# Altium PCB 十六继电器.PcbDoc (part 1 of 2)
Units mm, origin at the board's own origin, x right, y up, seen from the top; angles counter-clockwise.
Board outline 122.4 x 87.4 mm, 2 copper layers (Top Layer, Bottom Layer); 47 components, 80 nets, 279 pads, 15 vias.
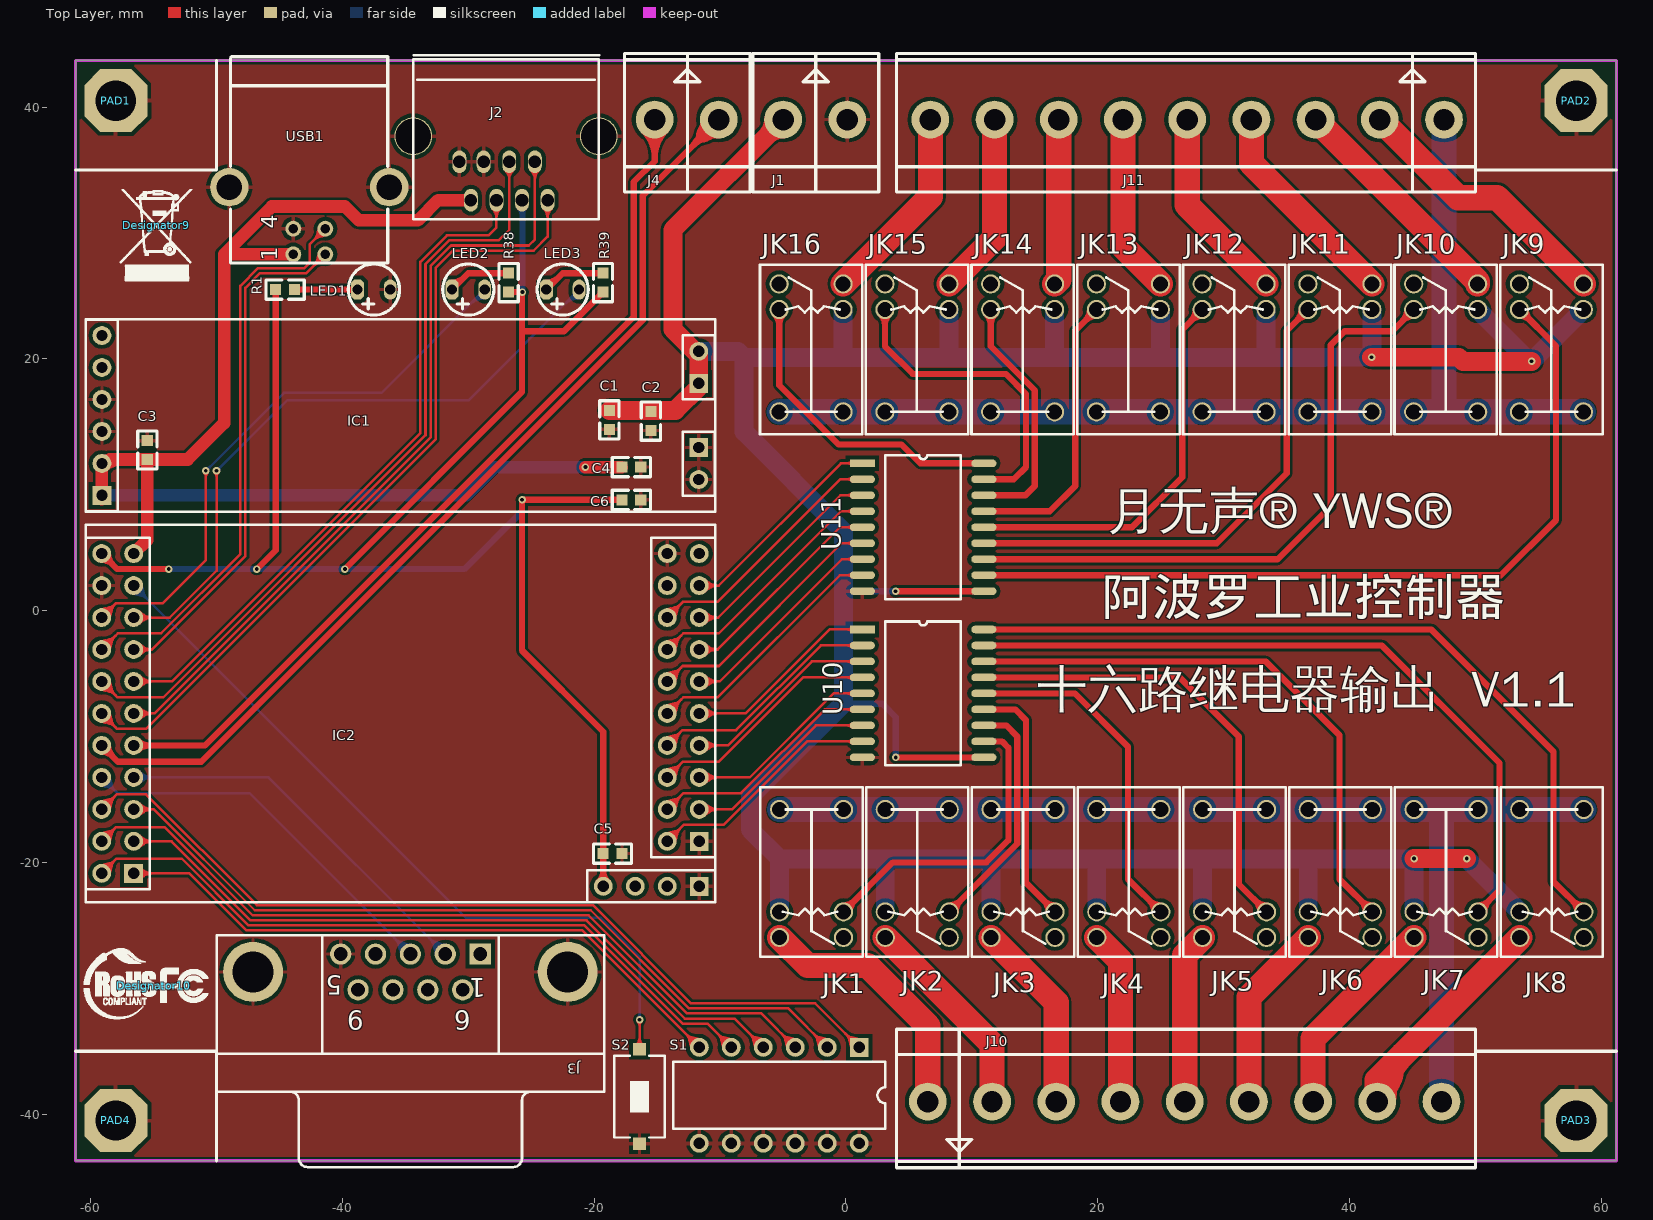
[diagram p0: Top Layer view]
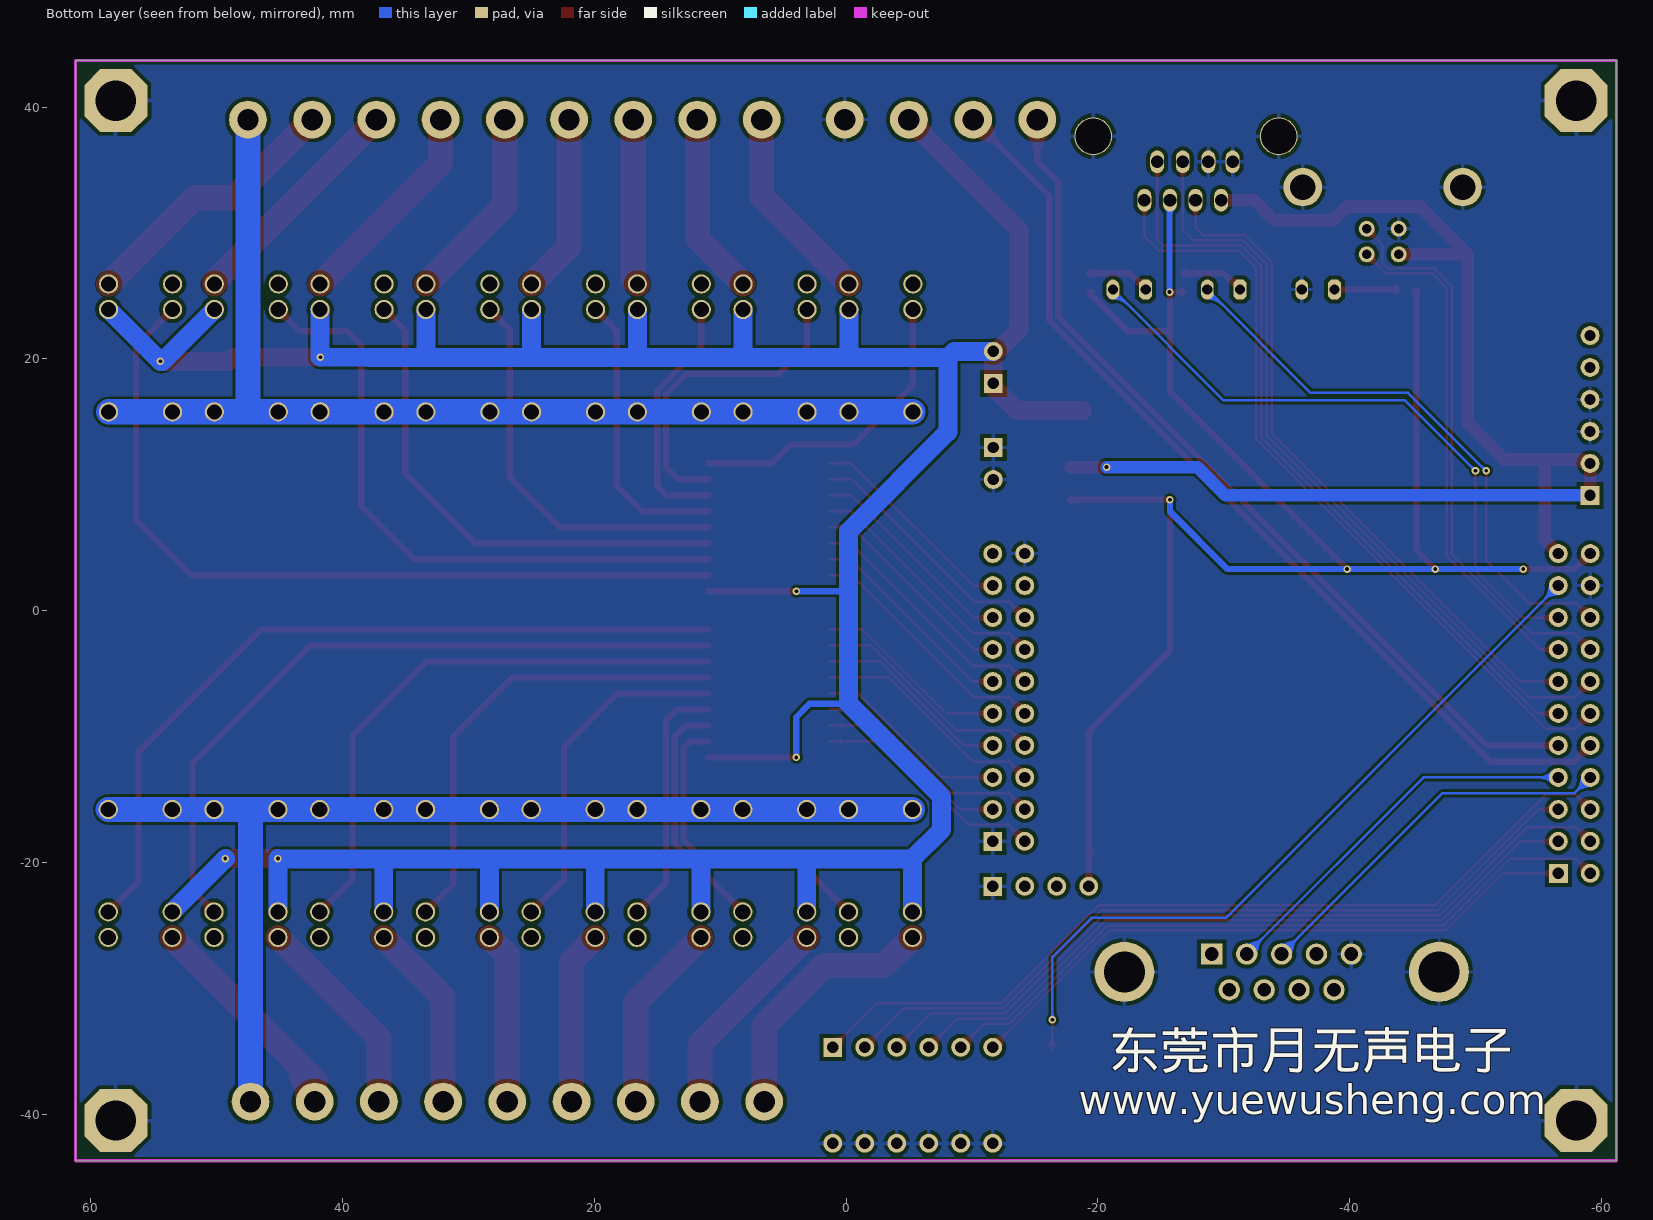
[diagram p1: Bottom Layer view, seen from below]

## Layer stack, top to bottom
Top Layer: signal copper 0.0356
Dielectric: dielectric 0.32, FR-4, Dk 4.8
Bottom Layer: signal copper 0.0356

## Board outline
-61.2,-43.7 61.2,-43.7 61.2,43.7 -61.2,43.7

## Design rules (kind name [scope] priority, off if disabled: settings)
Clearance [(InPadClass('All Pads')) vs InPolygon] p1: gap=0.3
Clearance Clearance_1 [All] p2: gap=0.2
ComponentClearance [All] p1 off: gap=0.254 collisioncheckmode=3 verticalgap=0.254 showdistances=FALSE
PlaneConnect [All] p1: planeconnectstyle=Relief reliefexpansion=0 reliefentries=4 reliefconductorwidth=0.3 reliefairgap=0.508
PolygonConnect PolygonConnect_1 [All vs IsComponentPad] p1: connectstyle=Relief reliefconductorwidth=0.3 reliefentries=4 polygonreliefangle="90 Angle" airgapwidth=0.3
PolygonConnect [All] p2: connectstyle=Direct reliefconductorwidth=0.3 reliefentries=4 polygonreliefangle="90 Angle" airgapwidth=0.3
RoomDefinition 6、十六继电器 [InComponentClass('6、十六继电器')] p1: confinementstyle=ConfineIn formatcopy=TRUE lockcomponents=FALSE outline -12,23.5 -12,28 3.5,28 3.5,46.6 62,46.6 62,-46.8 3.5,-46.8 3.5,-28 -12,-28 -12,-23.5 -9,-23.5 -9,23.5
RoomDefinition 公共电路 [InComponentClass('公共电路')] p2: confinementstyle=ConfineIn formatcopy=TRUE lockcomponents=FALSE outline -62,-44.5 3.5,-44.5 3.5,-43.7 61.2,-43.7 61.2,43.7 50,43.7 50,35 61.2,35 61.2,-35 50,-35 50,-43.7 3.5,-43.7 3.5,-28 -12,-28 -12,-23.5 -9.5,-23.5 -9.5,23.5 -12,23.5 -12,28 3.5,28 3.5,44.5 -62,44.5
RoutingVias [All] p1: holewidth=0.3 width=0.6 viastyle="Through Hole" minholewidth=0.3 minwidth=0.6 maxholewidth=0.3 maxwidth=0.6
SolderMaskExpansion [All] p1: expansion=0.102
Width [All] p1: maxlimit=2 minlimit=0.16 preferedwidth=0.2 minimp=50.000000 maximp=50.000000 favimp=50.000000
26 further rules are at their usual default settings.

## Classes and differential pairs
component class 公共电路: C1 C2 C3 C4 C5 C6 Designator9 Designator10 IC1 IC2 J1 J2 J3 J4 LED1 LED2 LED3 PAD1 PAD2 PAD3 PAD4 R1 R38 R39 S1 S2 usb1
component class 6、十六继电器: J10 J11 JK1 JK2 JK3 JK4 JK5 JK6 JK7 JK8 JK9 JK10 JK11 JK12 JK13 JK14 JK15 JK16 U10 U11

## Components (designator, comment, footprint, x,y, rotation, side; value= is the part's Value field where it differs from the comment)
C1 "104" 0603A -18.8,15.9 r270 top
C2 "104" 0603A -15.5,15.8 r270 top
C3 "104" 0603A -55.5,12 r90 top
C4 "104" 0603A -17.8,11.4 r0 top
C5 "104" 0603A -19.3,-19.3 r0 top
C6 "104" 0603A -17.8,8.8 r0 top
Designator9 "" HS -54.8,30.6 r0 top
Designator10 "" fc -55,-29.8 r0 top
IC1 "扩展模块电源板" 扩展模块电源板 -35.4,15.5 r180 top
IC2 "扩展模块核心板" 扩展模块核心板 -35.4,-8.2 r0 top
J1 "CON2" CON2*5.1 0.1,39 r0 top
J2 "CON8" "od-rj45 - duplicate" -23.7,32.6 r180 top
J3 "D Connector 9" DSUB1.385-2H9 -34.6,-38.2 r180 top
J4 "CON2" CON2*5.1 -10.1,39 r0 top
J10 "CON9" CON9*5.1 6.5,-39 r180 top
J11 "CON9" CON9*5.1 47.5,39 r0 top
JK1 "继电器6脚" RL -0.207,-15.811 r180 top
JK2 "继电器6脚" RL 8.193,-15.811 r180 top
JK3 "继电器6脚" RL 16.593,-15.811 r180 top
JK4 "继电器6脚" RL 24.993,-15.811 r180 top
JK5 "继电器6脚" RL 33.393,-15.811 r180 top
JK6 "继电器6脚" RL 41.793,-15.811 r180 top
JK7 "继电器6脚" RL 50.193,-15.811 r180 top
JK8 "继电器6脚" RL 58.593,-15.811 r180 top
JK9 "继电器6脚" RL 53.5,15.8 r0 top
JK10 "继电器6脚" RL 45.1,15.8 r0 top
JK11 "继电器6脚" RL 36.7,15.8 r0 top
JK12 "继电器6脚" RL 28.3,15.8 r0 top
JK13 "继电器6脚" RL 19.9,15.8 r0 top
JK14 "继电器6脚" RL 11.5,15.8 r0 top
JK15 "继电器6脚" RL 3.1,15.8 r0 top
JK16 "继电器6脚" RL -5.3,15.8 r0 top
LED1 "LED" LED2.5 -37.5,25.5 r180 top
LED2 "LED" LED2.5 -30,25.5 r180 top
LED3 "LED" LED2.5 -22.5,25.5 r180 top
PAD1 "PAD" PAD -58,40.5 r0 top
PAD2 "PAD" PAD 58,40.5 r0 top
PAD3 "PAD" PAD 58,-40.5 r0 top
PAD4 "PAD" PAD -58,-40.5 r0 top
R1 "160" 0603A -45.3,25.5 r0 top
R38 "160" 0603A -26.8,25.3 r90 top
R39 "160" 0603A -19.3,25.3 r90 top
S1 "SW DIP-6" DIP-12/SW -5.3,-38.5 r180 top
S2 "RESRT" SW-PB2 -16.4,-38.6 r270 top
U10 "ULN2803" sol18 1.3,-1.5 r0 top
U11 "ULN2803" sol18 1.3,11.7 r0 top
USB1 "USB" USB-B3 -43.9,28.3 r90 top

## Footprints (in the part's own frame and the unit in brackets; to place one, negate y for a bottom-side part, rotate by r counter-clockwise, add the part's x,y. Pads: shape width x height; smd on the part's side, far side on the other; paste and mask are expansions set on the pad)
0603A [mm]
  rect 0.88x0.88 smd: 1(0,0) 2(1.5,0)
  silkscreen extent -0.76,-0.76 2.26,0.76
CON2*5.1 [mm]
  round 3 hole 1.7: 1(0,0) 2(-5.1,0)
  silkscreen extent -7.5,-5.75 2.5,5.25
CON9*5.1 [mm]
  round 3 hole 1.7: 1(0,0) 2(-5.1,0) 3(-10.2,0) 4(-15.3,0) 5(-20.4,0) 6(-25.5,0) 7(-30.6,0) 8(-35.7,0) 9(-40.8,0)
  silkscreen extent -43.5,-5.75 2.5,5.25
DIP-12/SW [mm] "DIP Switch; 12 Leads"
  rect 1.5x1.5 hole 0.9: 1(-6.35,-3.81)
  round 1.5 hole 0.9: 2(-3.81,-3.81) 3(-1.27,-3.81) 4(1.27,-3.81) 5(3.81,-3.81) 6(6.35,-3.81) 7(6.35,3.81) 8(3.81,3.81) 9(1.27,3.81) 10(-1.27,3.81) 11(-3.81,3.81) 12(-6.35,3.81)
  silkscreen extent -8.43,-2.65 8.41,2.65
DSUB1.385-2H9 [mm] "Connector; D Subminiature; 9 Position; Right Angle; Pitch 1.385 mm"
  rect 1.69x1.69 hole 1.09: 1(-5.54,-10.92)
  round 1.69 hole 1.09: 2(-2.77,-10.92) 3(0,-10.92) 4(2.77,-10.92) 5(5.54,-10.92) 6(-4.155,-8.08) 7(-1.385,-8.08) 8(1.385,-8.08) 9(4.155,-8.08)
  round 4.76 hole 3.26: 10(-12.495,-9.5) 11(12.495,-9.5)
  silkscreen extent -15.4,-12.4 15.4,6
fc [mm]
  silkscreen extent -5.53,-2.62 4.36,3
HS [mm]
  silkscreen extent -2.87,-4.39 2.87,2.87
LED2.5 [mil]
  oct 40x63 hole 32: A(51.18,0)
  oval 40x63 hole 32: K(-51.18,0)
  silkscreen extent -80,-80 80,80
"od-rj45 - duplicate" [mm]
  oval 1.1x1.8 hole 1: 1(0,0) 2(1.016,-3.048) 3(2.032,0) 4(3.048,-3.048) 5(4.064,0) 6(5.08,-3.048) 7(6.096,0) 8(7.012,-3.048)
  round 3 hole 2.8: 8(-4.064,-5.08) 8(10.668,-5.08)
  silkscreen extent -4.1,-11.53 10.67,1.52
PAD [mm]
  oct 5x5 hole 3.2: 1(0,0)
RL [mil]
  round 60 hole 47.24: 1(-0.29,399.55) 2(-0.29,319.55) 6(-0.29,-0.45) 7(199.71,-0.45) 11(199.71,319.55) 12(199.71,399.55)
  silkscreen extent -60,-70 260,460
sol18 [mm]
  rect 2x0.6 smd: 1(0,0)
  oval 2x0.6 smd: 2(0,-1.27) 3(0,-2.54) 4(0,-3.81) 5(0,-5.08) 6(0,-6.35) 7(0,-7.62) 8(0,-8.89) 9(0,-10.16) 10(9.65,-10.16) 11(9.65,-8.89) 12(9.65,-7.62) 13(9.65,-6.35) 14(9.65,-5.08) 15(9.65,-3.81) 16(9.65,-2.54) 17(9.65,-1.27) 18(9.65,0)
  silkscreen extent 1.84,-10.79 7.82,0.64
SW-PB2 [mm]
  rect 1x1 smd: 1(-3.75,0) 2(3.75,0)
  silkscreen extent -3.25,-2 3.25,2
USB-B3 [mil]
  round 50 hole 30: 1(0,0) 2(0,-100) 3(80,-100) 4(80,0)
  round 120 hole 80: 5(210,200) 6(210,-300)
  silkscreen extent -28,-295 618,197
扩展模块核心板 [mm]
  rect 1.5x1.5 hole 0.9: 1(-21.18,-12.67) 42(23.74,-10.13) 43(23.74,-13.7)
  round 1.5 hole 0.9: 2(-23.72,-12.67) 3(-21.18,-10.13) 4(-23.72,-10.13) 5(-21.18,-7.59) 6(-23.72,-7.59) 7(-21.18,-5.05) 8(-23.72,-5.05) 9(-21.18,-2.51) 10(-23.72,-2.51) 11(-21.18,0.03) 12(-23.72,0.03) 13(-21.18,2.57) 14(-23.72,2.57) 15(-21.18,5.11) 16(-23.72,5.11) 17(-21.18,7.65) 18(-23.72,7.65) 19(-21.18,10.19) 20(-23.72,10.19) 21(-21.18,12.73) 22(-23.72,12.73) 23(21.2,12.73) 24(23.74,12.73) 25(21.2,10.19) 26(23.74,10.19) 27(21.2,7.65) 28(23.74,7.65) 29(21.2,5.11) 30(23.74,5.11) 31(21.2,2.57) 32(23.74,2.57) 33(21.2,0.03) 34(23.74,0.03) 35(21.2,-2.51) 36(23.74,-2.51) 37(21.2,-5.05) 38(23.74,-5.05) 39(21.2,-7.59) 40(23.74,-7.59) 41(21.2,-10.13) 44(21.2,-13.7) 45(18.66,-13.7) 46(16.12,-13.7)
  silkscreen extent -24.99,-14.97 25.01,15.03
扩展模块电源板 [mm]
  round 1.5 hole 0.9: 1(-23.7,-5.09) 2(-23.7,5.09) 3(23.7,3.81) 4(23.7,-1.27) 4(23.7,1.27) 5(23.7,-6.35) 5(23.7,-3.81)
  rect 1.5x1.5 hole 0.9: 1(-23.7,-2.55) 2(-23.7,2.55) 3(23.7,6.35)
  silkscreen extent -25,-7.65 25,7.65

## Part data
C1 C2 C3 C4 C5 C6: library part CAP, "Capacitor"
Designator9 Designator10: library part PAD
J3: "Receptacle Assembly, 9 Position, Right Angle"
R1 R38 R39: library part RES2
S1: "DIP Switch, 6 Position, SPST"
S2: library part SW-PB
USB1: library part "HEADER 3X2"

## Via types
v1: diameter 0.6, hole 0.3, Top Layer to Bottom Layer, 15 vias

## Nets (pads, with @x,y where several pads share a name; then routed paths per layer and width w, separated by ;. In a path a pad name is that pad's centre, name@x,y a point inside that pad or via, vN(x,y) a via of type N, cw(c..) or ccw(c..) an arc to the next point about the centre after c; other vN are vias at no path point)
485A: IC2.10 J4.1 | length 102
  Top Layer w0.5: IC2.10@-59.12,-10.41 IC2.10@-58.97,-10.56 ; -58.49,-11.379 cw(c-58.264,-10.535) IC2.10@-59.12,-10.71 ; -58.451,-11.34 ccw(c-59.295,-11.566) IC2.10@-59.12,-10.71 ; -11.667,37.816 cw(c-9.752,37.303) J4.1@-10.15,39.245 ; -11.284,37.433 ccw(c-11.797,39.348) J4.1@-9.855,38.95 ; J4.1@-10.1,39 -16.15,32.95 -16.15,23.06 -51.21,-12 -57.83,-12 IC2.10@-59.12,-10.71 ; -58.266,-11.564 cw(c-57.413,-10.71) -58.62,-10.71 ccw(c-57.413,-10.71) -58.266,-11.564 ; -58.266,-11.564 ccw(c-59.12,-12.417) -59.12,-11.21 cw(c-59.12,-12.417) -58.266,-11.564 ; -12.234,36.866 cw(c-10.1,34.732) -10.1,37.75 ccw(c-10.1,34.732) -12.234,36.866 ; -12.234,36.866 ccw(c-14.368,39) -11.35,39 cw(c-14.368,39) -12.234,36.866 ; -11.38,37.72 cw(c-10.1,36.439) -10.1,38.25 ccw(c-10.1,36.439) -11.38,37.72 ; -11.38,37.72 ccw(c-12.661,39) -10.85,39 cw(c-12.661,39) -11.38,37.72
485B: IC2.9 J4.2 | length 89.1
  Top Layer w0.5: IC2.9@-56.58,-10.71 -50.91,-10.71 -16.85,23.35 -16.85,34.05 -15.2,35.7 J4.2@-15.2,39 ; -55.373,-10.71 cw(c-55.373,-9.503) -56.226,-10.356 ccw(c-55.373,-9.503) -55.373,-10.71 ; -55.373,-10.71 ccw(c-55.373,-11.917) -56.226,-11.064 cw(c-55.373,-11.917) -55.373,-10.71 ; -15.2,35.982 cw(c-12.182,35.982) -14.316,38.116 ccw(c-12.182,35.982) -15.2,35.982 ; -15.2,35.982 ccw(c-18.218,35.982) -16.084,38.116 cw(c-18.218,35.982) -15.2,35.982 ; -15.2,37.189 cw(c-13.389,37.189) -14.67,38.47 ccw(c-13.389,37.189) -15.2,37.189 ; -15.2,37.189 ccw(c-17.011,37.189) -15.73,38.47 cw(c-17.011,37.189) -15.2,37.189
+3.3V: C5.1 C6.1 IC2.22 IC2.46 J2.3 R1.1 R38.1 R39.1 | length 163.5
  Top Layer w0.5: IC2.22@-59.12,4.83 IC2.22@-58.97,4.68 ; -58.49,3.861 cw(c-58.264,4.705) IC2.22@-59.12,4.53 ; -58.451,3.9 ccw(c-59.295,3.674) IC2.22@-59.12,4.53 ; v1(-53.8,3.3) -57.89,3.3 IC2.22@-59.12,4.53 ; v1(-46.8,3.3) -45.3,4.8 R1.1@-45.3,25.5 ; v1(-39.8,3.3) -25.732,17.368 -25.732,22.2 ; R38.1@-26.8,25.3 v1(-25.7,25.3) -25.732,25.268 -25.732,22.2 ; R39.1@-19.49,25.3 cw(c-19.949,25.3) -19.624,24.976 cw(c-19.3,24.651) R39.1@-19.3,25.11 ; R39.1@-19.3,25.3 -22.4,22.2 -25.732,22.2 ; IC2.46@-19.28,-21.9 -19.28,-9.62 -25.732,-3.168 v1(-25.732,8.8) C6.1@-17.8,8.8 ; -58.266,3.676 cw(c-57.413,4.53) -58.62,4.53 ccw(c-57.413,4.53) -58.266,3.676 ; -58.266,3.676 ccw(c-59.12,2.823) -59.12,4.03 cw(c-59.12,2.823) -58.266,3.676 ; -45.3,25.041 cw(c-44.841,25.041) -45.166,25.366 ccw(c-44.841,25.041) -45.3,25.041 ; -45.3,25.041 ccw(c-45.759,25.041) -45.434,25.366 cw(c-45.759,25.041) -45.3,25.041 ; -26.341,25.3 cw(c-26.341,25.759) -26.666,25.434 ccw(c-26.341,25.759) -26.341,25.3 ; -26.341,25.3 ccw(c-26.341,24.841) -26.666,25.166 cw(c-26.341,24.841) -26.341,25.3 ; -19.28,-20.693 cw(c-20.487,-20.693) -19.634,-21.546 ccw(c-20.487,-20.693) -19.28,-20.693 ; -19.28,-20.693 ccw(c-18.073,-20.693) -18.926,-21.546 cw(c-18.073,-20.693) -19.28,-20.693 ; -18.259,8.8 cw(c-18.259,8.341) -17.934,8.666 ccw(c-18.259,8.341) -18.259,8.8 ; -18.259,8.8 ccw(c-18.259,9.259) -17.934,8.934 cw(c-18.259,9.259) -18.259,8.8 ; C5.1@-19.434,-19.434 cw(c-19.807,-19.807) -19.28,-19.807 ccw(c-19.807,-19.807) C5.1@-19.434,-19.434 ; C5.1@-19.434,-19.166 ccw(c-19.807,-18.793) -19.28,-18.793 cw(c-19.807,-18.793) C5.1@-19.434,-19.166
  Bottom Layer w0.5: v1(-53.8,3.3) v1(-46.8,3.3) v1(-39.8,3.3) -30.3,3.3 -25.732,7.868 v1(-25.732,8.8) ; J2.3@-25.732,32.6 -25.7,32.568 v1(-25.7,25.3) ; J2.3@-25.944,32.038 cw(c-26.534,31.448) -25.7,31.448 ccw(c-26.534,31.448) J2.3@-25.944,32.038 ; -25.7,31.603 cw(c-25.085,31.603) -25.52,32.038 ccw(c-25.085,31.603) -25.7,31.603
+5V: C3.1 C4.1 IC1.3 IC2.21 J2.7 USB1.1 | length 108.3
  Top Layer w1: IC1.3@-59.1,8.85 IC1.3@-59.1,9.15 -59.1,11.39 -58.49,12 C3.1@-55.5,12 ; IC1.3@-58.96,11.897 ccw(c-58.611,12.414) -58.299,11.874 ; IC2.21@-56.58,4.53 -55.5,5.61 C3.1@-55.5,12 ; USB1.1@-43.9,28.3 -49.4,28.3 ; J2.7@-29.796,32.6 -32.4,32.6 -34,31 -38.7,31 -39.8,32.1 -45.6,32.1 -49.4,28.3 ; v1(-20.7,11.4) C4.1@-17.8,11.4 ; C3.1@-55.5,12 -52.3,12 -49.4,14.9 -49.4,28.3 ; IC1.3@-58.923,11.513 cw(c-57.748,10.338) -57.748,12 ccw(c-57.748,10.338) IC1.3@-58.923,11.513
  Bottom Layer w1: IC1.3@-59.1,9.15 -30.15,9.15 -27.9,11.4 v1(-20.7,11.4)
GND: C1.2 C2.2 C3.2 C4.2 C5.2 C6.2 IC1.2 IC1.4 IC2.20 IC2.23 IC2.42 IC2.43 J1.1 J2.6 J2.8 J3.5 J3.10 J3.11 LED1.K PAD1.1 PAD2.1 PAD3.1 PAD4.1 S1.7 S1.8 S1.9 S1.10 S1.11 S1.12 S2.2 U10.9 U11.9 USB1.4 USB1.5 USB1.6
NetJ10_1: J10.1 JK1.12 | length 20.7
  Top Layer w2: JK1.12@-5.28,-25.96 -3.04,-28.2 1.7,-28.2 6.5,-33 J10.1@6.5,-39
NetJ10_2: J10.2 JK2.12 | length 16.6
  Top Layer w2: JK2.12@3.12,-25.96 11.6,-34.44 J10.2@11.6,-39
NetJ10_3: J10.3 JK3.12 | length 15.2
  Top Layer w2: JK3.12@11.52,-25.96 16.7,-31.14 J10.3@16.7,-39
NetJ10_4: J10.4 JK4.12 | length 13.8
  Top Layer w2: JK4.12@19.92,-25.96 21.8,-27.84 J10.4@21.8,-39
NetJ10_5: J10.5 JK5.12 | length 13.6
  Top Layer w2: J10.5@26.9,-39 26.9,-27.38 JK5.12@28.32,-25.96
NetJ10_6: J10.6 JK6.12 | length 15
  Top Layer w2: J10.6@32,-39 32,-30.68 JK6.12@36.72,-25.96
NetJ10_7: J10.7 JK7.12 | length 16.4
  Top Layer w2: J10.7@37.1,-39 37.1,-33.98 JK7.12@45.12,-25.96
NetJ10_8: J10.8 JK8.12 | length 28.4
  Top Layer w2: J10.8@41.95,-38.567 ccw(c40.522,-36.094) 43.281,-36.833 ; J10.8@42.2,-39 42.2,-37.28 JK8.12@53.52,-25.96 ; J10.8@42.7,-39 cw(c48.06,-39) 44.27,-35.21 ccw(c48.06,-39) J10.8@42.7,-39
NetJ10_9: J10.9 JK1.6 JK1.7 JK2.6 JK2.7 JK3.6 JK3.7 JK4.6 JK4.7 JK5.6 JK5.7 JK6.6 JK6.7 JK7.6 JK7.7 JK8.6 JK8.7 | length 87.1
  Bottom Layer w2: JK1.7@-5.28,-15.8 JK1.6@-0.2,-15.8 JK2.7@3.12,-15.8 JK2.6@8.2,-15.8 JK3.7@11.52,-15.8 JK3.6@16.6,-15.8 JK4.7@19.92,-15.8 JK4.6@25,-15.8 JK5.7@28.32,-15.8 JK5.6@33.4,-15.8 JK6.7@36.72,-15.8 JK6.6@41.8,-15.8 JK7.7@45.12,-15.8 47.3,-15.8 ; J10.9@47.3,-39 47.3,-15.8 ; JK8.6@58.6,-15.8 JK8.7@53.52,-15.8 JK7.6@50.2,-15.8 47.3,-15.8
NetJ11_1: J11.1 JK9.6 JK9.7 JK10.6 JK10.7 JK11.6 JK11.7 JK12.6 JK12.7 JK13.6 JK13.7 JK14.6 JK14.7 JK15.6 JK15.7 JK16.6 JK16.7 | length 87.1
  Bottom Layer w2: JK16.6@-5.307,15.789 JK16.7@-0.227,15.789 JK15.6@3.093,15.789 JK15.7@8.173,15.789 JK14.6@11.493,15.789 JK14.7@16.573,15.789 JK13.6@19.893,15.789 JK13.7@24.973,15.789 JK12.6@28.293,15.789 JK12.7@33.373,15.789 JK11.6@36.693,15.789 JK11.7@41.773,15.789 JK10.6@45.093,15.789 47.5,15.789 ; J11.1@47.5,39 47.5,15.789 ; JK9.7@58.573,15.789 JK9.6@53.493,15.789 JK10.7@50.173,15.789 47.5,15.789
NetJ11_2: J11.2 JK9.12 | length 21.6
  Top Layer w2: J11.2@42.4,39 48.6,32.8 51.721,32.8 JK9.12@58.573,25.949
NetJ11_3: J11.3 JK10.12 | length 18.4
  Top Layer w2: J11.3@37.3,39 50.173,26.127 JK10.12@50.173,25.949
NetJ11_4: J11.4 JK11.12 | length 17
  Top Layer w2: J11.4@32.2,39 32.2,35.521 JK11.12@41.773,25.949
NetJ11_5: J11.5 JK12.12 | length 15.6
  Top Layer w2: J11.5@27.1,39 27.1,32.221 JK12.12@33.373,25.949
NetJ11_6: J11.6 JK13.12 | length 14.3
  Top Layer w2: J11.6@22,39 22,28.921 JK13.12@24.973,25.949
NetJ11_7: J11.7 JK14.12 | length 13.2
  Top Layer w2: JK14.12@16.573,25.949 16.9,26.276 J11.7@16.9,39
NetJ11_8: J11.8 JK15.12 | length 14.6
  Top Layer w2: JK15.12@8.173,25.949 11.8,29.576 J11.8@11.8,39
NetJ11_9: J11.9 JK16.12 | length 15.9
  Top Layer w2: JK16.12@-0.227,25.949 6.7,32.876 J11.9@6.7,39
NetJK1_2: JK1.2 U10.11 | length 30.8
  Top Layer w0.5: JK1.2@-0.202,-23.916 ccw(c-0.384,-23.03) 0.49,-23.264 ; JK1.2@-0.2,-23.928 3.728,-20 11.138,-20 12.9,-18.238 12.9,-10.9 12.39,-10.39 U10.11@10.95,-10.39 ; JK1.2@-0.188,-23.93 cw(c0.698,-24.112) 0.464,-23.238 ; 0.674,-23.054 cw(c-0.2,-22.18) -0.2,-23.416 ccw(c-0.2,-22.18) 0.674,-23.054 ; 0.674,-23.054 ccw(c1.548,-23.928) 0.312,-23.928 cw(c1.548,-23.928) 0.674,-23.054
NetJK2_2: JK2.2 U10.12 | length 25.1
  Top Layer w0.5: JK2.2@8.198,-23.916 ccw(c8.016,-23.03) 8.89,-23.264 ; JK2.2@8.2,-23.928 13.6,-18.528 13.6,-10 12.72,-9.12 U10.12@10.95,-9.12 ; JK2.2@8.212,-23.93 cw(c9.098,-24.112) 8.864,-23.238 ; 9.074,-23.054 cw(c8.2,-22.18) 8.2,-23.416 ccw(c8.2,-22.18) 9.074,-23.054 ; 9.074,-23.054 ccw(c9.948,-23.928) 8.712,-23.928 cw(c9.948,-23.928) 9.074,-23.054
NetJK3_2: JK3.2 U10.13 | length 25.8
  Top Layer w0.5: U10.13@10.95,-7.85 13.45,-7.85 14.3,-8.7 14.3,-21.628 JK3.2@16.6,-23.928 ; 15.91,-23.264 ccw(c16.784,-23.03) JK3.2@16.602,-23.916 ; 15.936,-23.238 cw(c15.702,-24.112) JK3.2@16.588,-23.93 ; 15.726,-23.054 cw(c14.852,-23.928) 16.088,-23.928 ccw(c14.852,-23.928) 15.726,-23.054 ; 15.726,-23.054 ccw(c16.6,-22.18) 16.6,-23.416 cw(c16.6,-22.18) 15.726,-23.054
NetJK4_2: JK4.2 U10.14 | length 33.3
  Top Layer w0.5: U10.14@10.95,-6.58 18.18,-6.58 22.4,-10.8 22.4,-21.328 JK4.2@25,-23.928 ; 24.31,-23.264 ccw(c25.184,-23.03) JK4.2@25.002,-23.916 ; 24.336,-23.238 cw(c24.102,-24.112) JK4.2@24.988,-23.93 ; 24.126,-23.054 cw(c23.252,-23.928) 24.488,-23.928 ccw(c23.252,-23.928) 24.126,-23.054 ; 24.126,-23.054 ccw(c25,-22.18) 25,-23.416 cw(c25,-22.18) 24.126,-23.054
NetJK5_2: JK5.2 U10.15 | length 42.9
  Top Layer w0.5: U10.15@10.95,-5.31 26.51,-5.31 31.2,-10 31.2,-21.728 JK5.2@33.4,-23.928 ; 32.71,-23.264 ccw(c33.584,-23.03) JK5.2@33.402,-23.916 ; 32.736,-23.238 cw(c32.502,-24.112) JK5.2@33.388,-23.93 ; 32.526,-23.054 cw(c31.652,-23.928) 32.888,-23.928 ccw(c31.652,-23.928) 32.526,-23.054 ; 32.526,-23.054 ccw(c33.4,-22.18) 33.4,-23.416 cw(c33.4,-22.18) 32.526,-23.054
NetJK6_2: JK6.2 U10.16 | length 51.7
  Top Layer w0.5: U10.16@10.95,-4.04 33.34,-4.04 39.2,-9.9 39.2,-21.328 JK6.2@41.8,-23.928 ; 41.11,-23.264 ccw(c41.984,-23.03) JK6.2@41.802,-23.916 ; 41.136,-23.238 cw(c40.902,-24.112) JK6.2@41.788,-23.93 ; 40.926,-23.054 cw(c40.052,-23.928) 41.288,-23.928 ccw(c40.052,-23.928) 40.926,-23.054 ; 40.926,-23.054 ccw(c41.8,-22.18) 41.8,-23.416 cw(c41.8,-22.18) 40.926,-23.054
NetJK7_2: JK7.2 U10.17 | length 63.2
  Top Layer w0.5: U10.17@10.95,-2.77 42.57,-2.77 51.9,-12.1 51.9,-22.228 JK7.2@50.2,-23.928 ; JK7.2@50.198,-23.916 ccw(c50.016,-23.03) 50.89,-23.264 ; JK7.2@50.212,-23.93 cw(c51.098,-24.112) 50.864,-23.238 ; 51.074,-23.054 cw(c50.2,-22.18) 50.2,-23.416 ccw(c50.2,-22.18) 51.074,-23.054 ; 51.074,-23.054 ccw(c51.948,-23.928) 50.712,-23.928 cw(c51.948,-23.928) 51.074,-23.054
NetJK8_2: JK8.2 U10.18 | length 68.9
  Top Layer w0.5: U10.18@10.95,-1.5 46.5,-1.5 56.2,-11.2 56.2,-21.528 JK8.2@58.6,-23.928 ; 57.91,-23.264 ccw(c58.784,-23.03) JK8.2@58.602,-23.916 ; 57.936,-23.238 cw(c57.702,-24.112) JK8.2@58.588,-23.93 ; 57.726,-23.054 cw(c56.852,-23.928) 58.088,-23.928 ccw(c56.852,-23.928) 57.726,-23.054 ; 57.726,-23.054 ccw(c58.6,-22.18) 58.6,-23.416 cw(c58.6,-22.18) 57.726,-23.054
NetJK9_2: JK9.2 U11.11 | length 71.1
  Top Layer w0.5: U11.11@10.95,2.81 52.01,2.81 56.4,7.2 56.4,21.009 JK9.2@53.493,23.917 ; JK9.2@53.49,23.905 cw(c53.309,23.019) 54.182,23.253 ; JK9.2@53.504,23.919 ccw(c54.391,24.1) 54.156,23.227 ; 54.367,23.043 cw(c55.241,23.917) 54.005,23.917 ccw(c55.241,23.917) 54.367,23.043 ; 54.367,23.043 ccw(c53.493,22.169) 53.493,23.405 cw(c53.493,22.169) 54.367,23.043
NetJK10_2: JK10.2 U11.12 | length 55.7
  Top Layer w0.5: U11.12@10.95,4.08 34.28,4.08 38.5,8.3 38.5,21.1 39.6,22.2 43.376,22.2 JK10.2@45.093,23.917 ; 44.403,23.253 cw(c45.276,23.019) JK10.2@45.095,23.905 ; 44.429,23.227 ccw(c44.195,24.1) JK10.2@45.081,23.919 ; 44.219,23.043 cw(c45.093,22.169) 45.093,23.405 ccw(c45.093,22.169) 44.219,23.043 ; 44.219,23.043 ccw(c43.345,23.917) 44.581,23.917 cw(c43.345,23.917) 44.219,23.043
NetJK11_2: JK11.2 U11.13 | length 46
  Top Layer w0.5: U11.13@10.95,5.35 29.45,5.35 35,10.9 35,22.224 JK11.2@36.693,23.917 ; 36.003,23.253 cw(c36.876,23.019) JK11.2@36.695,23.905 ; 36.029,23.227 ccw(c35.795,24.1) JK11.2@36.681,23.919 ; 35.819,23.043 cw(c36.693,22.169) 36.693,23.405 ccw(c36.693,22.169) 35.819,23.043 ; 35.819,23.043 ccw(c34.945,23.917) 36.181,23.917 cw(c34.945,23.917) 35.819,23.043
NetJK12_2: JK12.2 U11.14 | length 37.3
  Top Layer w0.5: U11.14@10.95,6.62 22.72,6.62 26.7,10.6 26.7,22.324 JK12.2@28.293,23.917 ; 27.603,23.253 cw(c28.476,23.019) JK12.2@28.295,23.905 ; 27.629,23.227 ccw(c27.395,24.1) JK12.2@28.281,23.919 ; 27.419,23.043 cw(c28.293,22.169) 28.293,23.405 ccw(c28.293,22.169) 27.419,23.043 ; 27.419,23.043 ccw(c26.545,23.917) 27.781,23.917 cw(c26.545,23.917) 27.419,23.043
NetJK13_2: JK13.2 U11.15 | length 28.7
  Top Layer w0.5: U11.15@10.95,7.89 16.19,7.89 18.2,9.9 18.2,22.224 JK13.2@19.893,23.917 ; 19.203,23.253 cw(c20.076,23.019) JK13.2@19.895,23.905 ; 19.229,23.227 ccw(c18.995,24.1) JK13.2@19.881,23.919 ; 19.019,23.043 cw(c19.893,22.169) 19.893,23.405 ccw(c19.893,22.169) 19.019,23.043 ; 19.019,23.043 ccw(c18.145,23.917) 19.381,23.917 cw(c18.145,23.917) 19.019,23.043
NetJK14_2: JK14.2 U11.16 | length 23.7
  Top Layer w0.5: U11.16@10.95,9.16 14.26,9.16 15,9.9 15,17.49 11.493,20.997 JK14.2@11.493,23.917 ; 11.493,22.681 cw(c12.729,22.681) 11.855,23.555 ccw(c12.729,22.681) 11.493,22.681 ; 11.493,22.681 ccw(c10.257,22.681) 11.131,23.555 cw(c10.257,22.681) 11.493,22.681
NetJK15_2: JK15.2 U11.17 | length 29.1
  Top Layer w0.5: JK15.2@3.093,23.917 3.093,21.007 5.3,18.8 12.7,18.8 14.3,17.2 14.3,11.4 13.33,10.43 U11.17@10.95,10.43 ; 3.093,22.681 cw(c4.329,22.681) 3.455,23.555 ccw(c4.329,22.681) 3.093,22.681 ; 3.093,22.681 ccw(c1.857,22.681) 2.731,23.555 cw(c1.857,22.681) 3.093,22.681
NetJK16_2: JK16.2 U11.18 | length 28.7
  Top Layer w0.5: JK16.2@-5.307,23.917 -5.307,17.907 -0.6,13.2 4.4,13.2 5.9,11.7 U11.18@10.95,11.7 ; -5.307,22.681 cw(c-4.071,22.681) -4.945,23.555 ccw(c-4.071,22.681) -5.307,22.681 ; -5.307,22.681 ccw(c-6.543,22.681) -5.669,23.555 cw(c-6.543,22.681) -5.307,22.681
NetLED1_A: LED1.A R1.2 | length 8.4
  Top Layer w0.5: R1.2@-43.8,25.5 LED1.A@-38.8,25.5 ; -43.341,25.5 cw(c-43.341,25.959) -43.666,25.634 ccw(c-43.341,25.959) -43.341,25.5 ; -43.341,25.5 ccw(c-43.341,25.041) -43.666,25.366 cw(c-43.341,25.041) -43.341,25.5 ; -39.423,25.5 cw(c-39.423,24.877) -38.982,25.318 ccw(c-39.423,24.877) -39.423,25.5 ; -39.423,25.5 ccw(c-39.423,26.123) -38.982,25.682 cw(c-39.423,26.123) -39.423,25.5
NetLED2_A: LED2.A R38.2 | length 6.8
  Top Layer w0.5: LED2.A@-31.3,25.5 -30,26.8 R38.2@-26.8,26.8 ; LED2.A@-31.3,26.05 ccw(c-31.3,27.378) -30.361,26.439 ; R38.2@-26.934,26.666 ccw(c-27.259,26.341) -27.259,26.8 ccw(c-27.259,27.259) R38.2@-26.934,26.934
NetLED3_A: LED3.A R39.2 | length 6.8
  Top Layer w0.5: LED3.A@-23.8,25.5 -22.5,26.8 R39.2@-19.3,26.8 ; LED3.A@-23.8,26.05 ccw(c-23.8,27.378) -22.861,26.439 ; R39.2@-19.434,26.666 ccw(c-19.759,26.341) -19.759,26.8 ccw(c-19.759,27.259) R39.2@-19.434,26.934
NRST: IC2.19 S2.1 | length 78.3
  Top Layer w0.2: S2.1@-16.4,-34.85 v1(-16.4,-32.5) ; -16.4,-33.884 cw(c-17.366,-33.884) -16.683,-34.567 ccw(c-17.366,-33.884) -16.4,-33.884 ; -16.4,-33.884 ccw(c-15.434,-33.884) -16.117,-34.567 cw(c-15.434,-33.884) -16.4,-33.884 ; -16.4,-32.983 cw(c-15.917,-32.983) -16.259,-32.641 ccw(c-15.917,-32.983) -16.4,-32.983 ; -16.4,-32.983 ccw(c-16.883,-32.983) -16.541,-32.641 cw(c-16.883,-32.983) -16.4,-32.983
  Bottom Layer w0.2: IC2.19@-56.923,1.92 ccw(c-56.087,2.091) -56.308,1.267 ; IC2.19@-56.727,1.96 ccw(c-55.733,2.163) -55.996,1.183 ; IC2.19@-56.58,1.99 -30.19,-24.4 -19.5,-24.4 -16.4,-27.5 v1(-16.4,-32.5) ; IC2.19@-56.55,2.137 cw(c-56.753,1.143) -55.773,1.406 ; IC2.19@-56.51,2.333 cw(c-56.681,1.497) -55.857,1.718 ; -55.812,1.222 cw(c-55.044,1.99) -56.13,1.99 ccw(c-55.044,1.99) -55.812,1.222 ; -55.812,1.222 ccw(c-56.58,0.454) -56.58,1.54 cw(c-56.58,0.454) -55.812,1.222 ; -55.47,0.88 cw(c-54.361,1.99) -55.93,1.99 ccw(c-54.361,1.99) -55.47,0.88 ; -55.47,0.88 ccw(c-56.58,-0.229) -56.58,1.34 cw(c-56.58,-0.229) -55.47,0.88 ; -16.4,-32.017 cw(c-16.883,-32.017) -16.541,-32.359 ccw(c-16.883,-32.017) -16.4,-32.017 ; -16.4,-32.017 ccw(c-15.917,-32.017) -16.259,-32.359 cw(c-15.917,-32.017) -16.4,-32.017
PA0: IC2.25
PA1: IC2.24
PA4: IC2.26 U11.1 | length 26.7
  Top Layer w0.2: IC2.26@-11.66,1.99 -10.11,1.99 ; U11.1@1.3,11.7 -0.4,11.7 -10.11,1.99 ; -10.587,1.99 cw(c-10.587,3.044) -11.339,2.305 ccw(c-10.587,3.044) -10.587,1.99 ; -10.587,1.99 ccw(c-10.587,0.936) -11.339,1.675 cw(c-10.587,0.936) -10.587,1.99 ; -10.11,1.99 cw(c-10.11,3.513) -11.196,2.446 ccw(c-10.11,3.513) -10.11,1.99 ; -10.11,1.99 ccw(c-10.11,0.467) -11.196,1.534 cw(c-10.11,0.467) -10.11,1.99 ; 0.117,11.7 cw(c0.117,11.217) 0.459,11.559 ccw(c0.117,11.217) 0.117,11.7 ; 0.117,11.7 ccw(c0.117,12.183) 0.459,11.841 cw(c0.117,12.183) 0.117,11.7
PA5: IC2.27 U11.2 | length 35.6
  Top Layer w0.2: IC2.27@-14.543,-0.48 cw(c-13.707,-0.651) -13.928,0.173 ; IC2.27@-14.347,-0.52 cw(c-13.353,-0.723) -13.616,0.257 ; IC2.27@-14.201,-0.5 ccw(c-14.208,0.114) -13.615,-0.045 ; IC2.27@-14.2,-0.55 -12.95,0.7 -10.2,0.7 -0.47,10.43 U11.2@1.3,10.43 ; IC2.27@-14.17,-0.697 ccw(c-14.373,0.297) -13.393,0.034 ; IC2.27@-14.15,-0.551 cw(c-13.536,-0.558) -13.695,0.035 ; IC2.27@-14.13,-0.893 ccw(c-14.301,-0.057) -13.477,-0.278 ; -13.432,0.218 cw(c-14.2,0.986) -14.2,-0.1 ccw(c-14.2,0.986) -13.432,0.218 ; -13.432,0.218 ccw(c-12.664,-0.55) -13.75,-0.55 cw(c-12.664,-0.55) -13.432,0.218 ; -13.09,0.56 cw(c-14.2,1.669) -14.2,0.1 ccw(c-14.2,1.669) -13.09,0.56 ; -13.09,0.56 ccw(c-11.981,-0.55) -13.55,-0.55 cw(c-11.981,-0.55) -13.09,0.56 ; 0.117,10.43 cw(c0.117,9.947) 0.459,10.289 ccw(c0.117,9.947) 0.117,10.43 ; 0.117,10.43 ccw(c0.117,10.913) 0.459,10.571 cw(c0.117,10.913) 0.117,10.43
PA6: IC2.28 U11.3 | length 26.4
  Top Layer w0.2: IC2.28@-11.66,-0.55 -10.15,-0.55 ; U11.3@1.3,9.16 -0.44,9.16 -10.15,-0.55 ; -10.615,-0.55 cw(c-10.615,0.439) -11.333,-0.241 ccw(c-10.615,0.439) -10.615,-0.55 ; -10.615,-0.55 ccw(c-10.615,-1.539) -11.333,-0.859 cw(c-10.615,-1.539) -10.615,-0.55 ; -10.15,-0.55 cw(c-10.15,0.879) -11.188,-0.103 ccw(c-10.15,0.879) -10.15,-0.55 ; -10.15,-0.55 ccw(c-10.15,-1.979) -11.188,-0.997 cw(c-10.15,-1.979) -10.15,-0.55 ; 0.117,9.16 cw(c0.117,8.677) 0.459,9.019 ccw(c0.117,8.677) 0.117,9.16 ; 0.117,9.16 ccw(c0.117,9.643) 0.459,9.301 cw(c0.117,9.643) 0.117,9.16
PA7: IC2.29 U11.4 | length 35.6
  Top Layer w0.2: IC2.29@-14.543,-3.02 cw(c-13.707,-3.191) -13.928,-2.367 ; IC2.29@-14.347,-3.06 cw(c-13.353,-3.263) -13.616,-2.283 ; IC2.29@-14.201,-3.04 ccw(c-14.208,-2.426) -13.615,-2.585 ; IC2.29@-14.2,-3.09 -12.91,-1.8 -10.1,-1.8 -0.41,7.89 U11.4@1.3,7.89 ; IC2.29@-14.17,-3.237 ccw(c-14.373,-2.243) -13.393,-2.506 ; IC2.29@-14.15,-3.091 cw(c-13.536,-3.098) -13.695,-2.505 ; IC2.29@-14.13,-3.433 ccw(c-14.301,-2.597) -13.477,-2.818 ; -13.432,-2.322 cw(c-14.2,-1.554) -14.2,-2.64 ccw(c-14.2,-1.554) -13.432,-2.322 ; -13.432,-2.322 ccw(c-12.664,-3.09) -13.75,-3.09 cw(c-12.664,-3.09) -13.432,-2.322 ; -13.09,-1.98 cw(c-14.2,-0.871) -14.2,-2.44 ccw(c-14.2,-0.871) -13.09,-1.98 ; -13.09,-1.98 ccw(c-11.981,-3.09) -13.55,-3.09 cw(c-11.981,-3.09) -13.09,-1.98 ; 0.117,7.89 cw(c0.117,7.407) 0.459,7.749 ccw(c0.117,7.407) 0.117,7.89 ; 0.117,7.89 ccw(c0.117,8.373) 0.459,8.031 cw(c0.117,8.373) 0.117,7.89
PA8: IC2.41 U10.8 | length 34.4
  Top Layer w0.2: IC2.41@-14.543,-18.26 cw(c-13.707,-18.431) -13.928,-17.607 ; IC2.41@-14.347,-18.3 cw(c-13.353,-18.503) -13.616,-17.523 ; IC2.41@-14.201,-18.28 ccw(c-14.208,-17.666) -13.615,-17.825 ; IC2.41@-14.2,-18.33 -12.87,-17 -9.7,-17 -3.09,-10.39 U10.8@1.3,-10.39 ; IC2.41@-14.17,-18.477 ccw(c-14.373,-17.483) -13.393,-17.746 ; IC2.41@-14.15,-18.331 cw(c-13.536,-18.338) -13.695,-17.745 ; IC2.41@-14.13,-18.673 ccw(c-14.301,-17.837) -13.477,-18.058 ; -13.432,-17.562 cw(c-14.2,-16.794) -14.2,-17.88 ccw(c-14.2,-16.794) -13.432,-17.562 ; -13.432,-17.562 ccw(c-12.664,-18.33) -13.75,-18.33 cw(c-12.664,-18.33) -13.432,-17.562 ; -13.09,-17.22 cw(c-14.2,-16.111) -14.2,-17.68 ccw(c-14.2,-16.111) -13.09,-17.22 ; -13.09,-17.22 ccw(c-11.981,-18.33) -13.55,-18.33 cw(c-11.981,-18.33) -13.09,-17.22 ; 0.117,-10.39 cw(c0.117,-10.873) 0.459,-10.531 ccw(c0.117,-10.873) 0.117,-10.39 ; 0.117,-10.39 ccw(c0.117,-9.907) 0.459,-10.249 cw(c0.117,-9.907) 0.117,-10.39
PA13: IC2.14 J2.4 | length 81
  Top Layer w0.2: IC2.14@-59.463,-5.7 ccw(c-58.627,-5.529) -58.848,-6.353 ; IC2.14@-59.267,-5.66 ccw(c-58.273,-5.457) -58.536,-6.437 ; IC2.14@-59.121,-5.68 cw(c-59.128,-6.294) -58.535,-6.135 ; IC2.14@-59.12,-5.63 -57.85,-6.9 -54.231,-6.9 -33.4,13.931 -33.4,27.531 -31.531,29.4 -27.6,29.4 -26.748,30.252 J2.4@-26.748,35.648 ; IC2.14@-59.09,-5.483 cw(c-59.293,-6.477) -58.313,-6.214 ; IC2.14@-59.07,-5.629 ccw(c-58.456,-5.622) -58.615,-6.215 ; IC2.14@-59.05,-5.287 cw(c-59.221,-6.123) -58.397,-5.902 ; -58.352,-6.398 cw(c-57.584,-5.63) -58.67,-5.63 ccw(c-57.584,-5.63) -58.352,-6.398 ; -58.352,-6.398 ccw(c-59.12,-7.166) -59.12,-6.08 cw(c-59.12,-7.166) -58.352,-6.398 ; -58.01,-6.74 cw(c-56.901,-5.63) -58.47,-5.63 ccw(c-56.901,-5.63) -58.01,-6.74 ; -58.01,-6.74 ccw(c-59.12,-7.849) -59.12,-6.28 cw(c-59.12,-7.849) -58.01,-6.74 ; -26.748,34.212 cw(c-25.662,34.212) -26.43,34.98 ccw(c-25.662,34.212) -26.748,34.212 ; -26.748,34.212 ccw(c-27.834,34.212) -27.066,34.98 cw(c-27.834,34.212) -26.748,34.212 ; -26.748,34.694 cw(c-26.144,34.694) -26.571,35.121 ccw(c-26.144,34.694) -26.748,34.694 ; -26.748,34.694 ccw(c-27.352,34.694) -26.925,35.121 cw(c-27.352,34.694) -26.748,34.694
PA14: IC2.13 J2.5 | length 67.5
  Top Layer w0.2: IC2.13@-56.58,-5.63 -53.527,-5.63 -33.8,14.097 -33.8,27.697 -31.697,29.8 -28.4,29.8 -27.764,30.436 J2.5@-27.764,32.6 ; -55.494,-5.63 cw(c-55.494,-4.544) -56.262,-5.312 ccw(c-55.494,-4.544) -55.494,-5.63 ; -55.494,-5.63 ccw(c-55.494,-6.716) -56.262,-5.948 cw(c-55.494,-6.716) -55.494,-5.63 ; -55.011,-5.63 cw(c-55.011,-4.061) -56.12,-5.17 ccw(c-55.011,-4.061) -55.011,-5.63 ; -55.011,-5.63 ccw(c-55.011,-7.199) -56.12,-6.09 cw(c-55.011,-7.199) -55.011,-5.63 ; -27.764,31.164 cw(c-26.678,31.164) -27.446,31.932 ccw(c-26.678,31.164) -27.764,31.164 ; -27.764,31.164 ccw(c-28.85,31.164) -28.082,31.932 cw(c-28.85,31.164) -27.764,31.164 ; -27.764,31.646 cw(c-27.16,31.646) -27.587,32.073 ccw(c-27.16,31.646) -27.764,31.646 ; -27.764,31.646 ccw(c-28.368,31.646) -27.941,32.073 cw(c-28.368,31.646) -27.764,31.646
PB0: IC2.32 U11.7 | length 26.8
  Top Layer w0.2: IC2.32@-11.66,-5.63 -10.03,-5.63 -0.32,4.08 U11.7@1.3,4.08 ; -10.574,-5.63 cw(c-10.574,-4.544) -11.342,-5.312 ccw(c-10.574,-4.544) -10.574,-5.63 ; -10.574,-5.63 ccw(c-10.574,-6.716) -11.342,-5.948 cw(c-10.574,-6.716) -10.574,-5.63 ; -10.091,-5.63 cw(c-10.091,-4.061) -11.2,-5.17 ccw(c-10.091,-4.061) -10.091,-5.63 ; -10.091,-5.63 ccw(c-10.091,-7.199) -11.2,-6.09 cw(c-10.091,-7.199) -10.091,-5.63 ; 0.117,4.08 cw(c0.117,3.597) 0.459,3.939 ccw(c0.117,3.597) 0.117,4.08 ; 0.117,4.08 ccw(c0.117,4.563) 0.459,4.221 cw(c0.117,4.563) 0.117,4.08